# Altium PCB attenuator-pcb - 5.PcbDoc
Units mm, origin at the board's own origin, x right, y up, seen from the top; angles counter-clockwise.
Board outline 38.59 x 19.18 mm, 2 copper layers (Top Layer, Bottom Layer), stack 1.56 mm thick; 8 components, 37 nets, 22 pads, 34 vias.
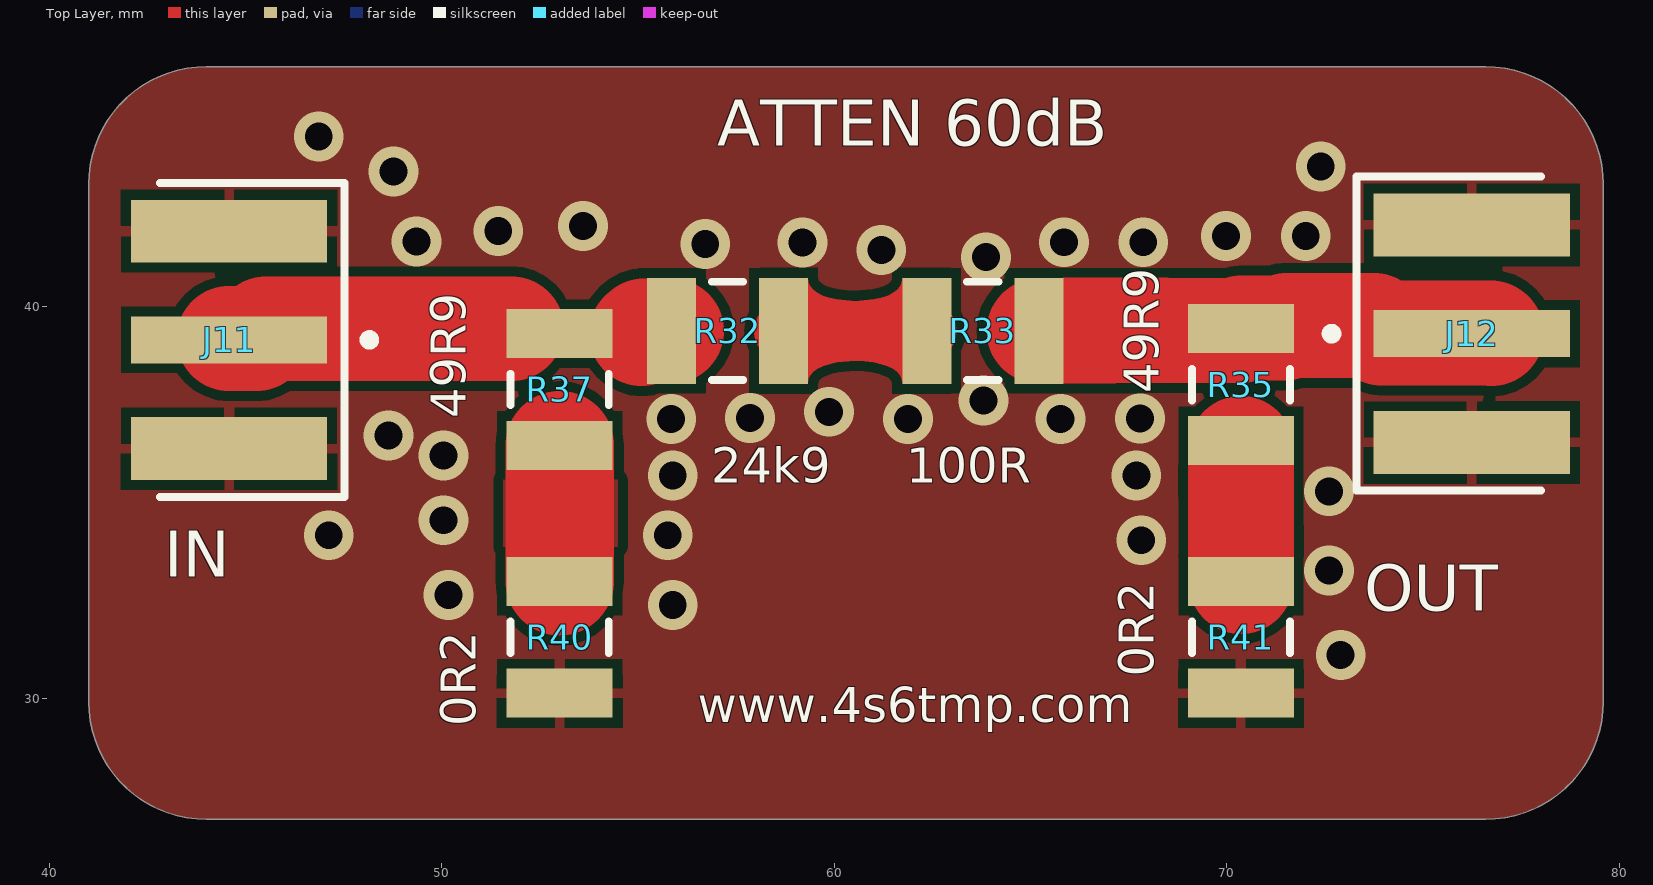
[diagram p0: Top Layer view]
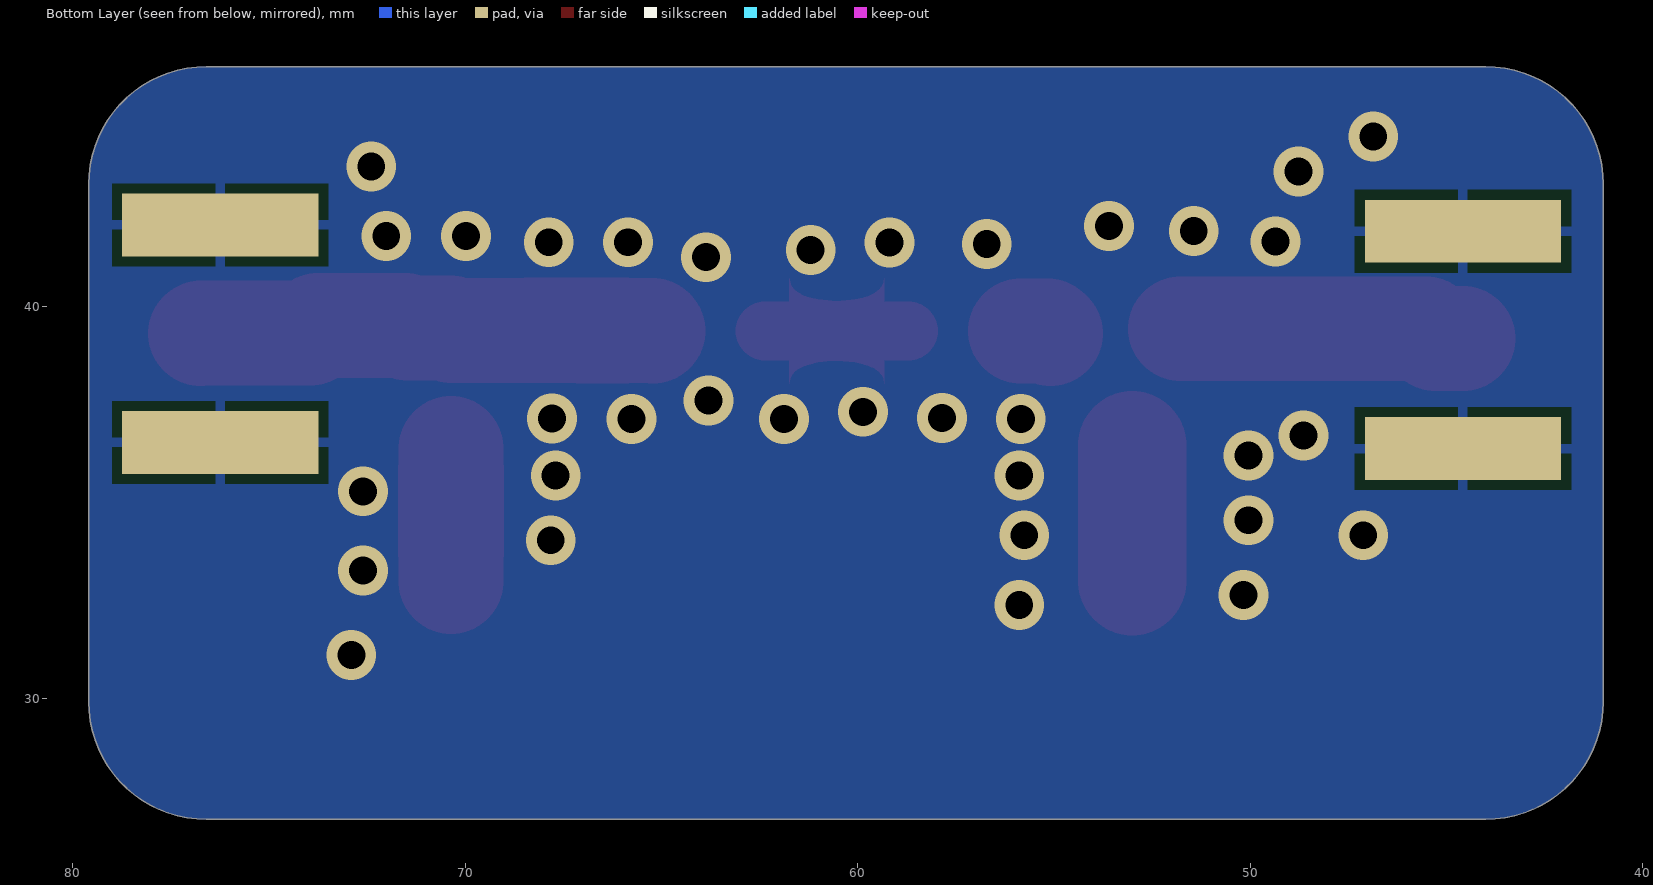
[diagram p1: Bottom Layer view, seen from below]

## Layer stack, top to bottom
Top Solder: solder mask 0.0203, Solder Resist, Dk 3.8
Top Layer: signal copper 0.035
Prepreg 7628: dielectric 1.49, FR-4, Dk 4.6
Bottom Layer: signal copper 0.035
Bottom Solder: solder mask 0.0203, Solder Resist, Dk 3.8

## Board outline
41,29.924 ccw(c44,29.924) 44,26.924 76.59,26.924 ccw(c76.59,29.924) 79.59,29.924 79.59,43.101 ccw(c76.59,43.101) 76.59,46.101 44,46.101 ccw(c44,43.101) 41,43.101

## Design rules (kind name [scope] priority, off if disabled: settings)
Clearance [All] p1: gap=0.254 ignorepadtopadclearanceinfootprint=FALSE except(0: Arc-Hole Track-Hole SMDPad-Hole THPad-Hole Via-Hole Fill-Hole Poly-Hole Region-Hole Text-Hole)
HoleToHoleClearance [All] p1: gap=0.1 allowstackedmicrovias=TRUE
MinimumSolderMaskSliver [All] p1 off: minsoldermaskwidth=0.1
PolygonConnect [All] p1: connectstyle=Relief reliefconductorwidth=0.254 reliefentries=4 polygonreliefangle="90 Angle" airgapwidth=0.254
RoomDefinition schematic [InComponentClass('schematic')] p1: confinementstyle=ConfineIn formatcopy=TRUE lockcomponents=FALSE outline 31.75,26.779 88.773,26.779 88.773,47.498 31.75,47.498
RoutingVias [All] p1: holewidth=0.711 width=1.27 viastyle="Through Hole" minholewidth=0.711 minwidth=1.27 maxholewidth=0.711 maxwidth=1.27
SolderMaskExpansion [All] p1: expansion=0.102 istentingtop=FALSE
Width [All] p1: maxlimit=3 minlimit=1.5 preferedwidth=2.673 impedanceprofiledriven=TRUE impedanceprofileid={88FF0C83-8680-40BB-AEE6-F79FA2882ED4} impedanceprofilevalue=50.000000 minimp=50.000000 maximp=50.000000 favimp=50.000000
Width Width_1 [All] p2: maxlimit=2 minlimit=0.254 preferedwidth=1 minimp=50.000000 maximp=50.000000 favimp=50.000000
28 further rules are at their usual default settings.

## Components (designator, comment, footprint, x,y, rotation, side; value= is the part's Value field where it differs from the comment)
J11 "IN" FP-CON-SMA-EDGE-S-MFG 37.317,39.14 r90 top
J12 "OUT" FP-CON-SMA-EDGE-S-MFG 83.5,39.298 r270 top
R32 "24k9" RESC3225X70X50NL20T20 57.277,39.37 r0 top
R33 "100R" RESC3225X70X50NL20T20 63.782,39.37 r0 top
R35 "49R9" RESC3225X70X50NL20T20 70.358,38 r90 top
R37 "49R9" RESC3225X70X50NL20T20 53,37.877 r90 top
R40 "0R2" RESC3225X70X50NL20T20 53,31.564 r90 top
R41 "0R2" RESC3225X70X50NL20T20 70.358,31.564 r90 top

## Footprints (in the part's own frame and the unit in brackets; to place one, negate y for a bottom-side part, rotate by r counter-clockwise, add the part's x,y. Pads: shape width x height; smd on the part's side, far side on the other; paste and mask are expansions set on the pad)
FP-CON-SMA-EDGE-S-MFG [mm]
  rect 1.2x5 smd paste+0 mask+0: 1(0,-7.26)
  rect 1.6x5 smd paste+0 mask+0: 2(-2.77,-7.26) 3(2.77,-7.26)
  rect 1.6x5 smd far side paste+0 mask+0: 4(-2.77,-7.26) 5(2.77,-7.26)
  silkscreen extent -4,-10.96 4,-5.5, body extent -3.67,-9.86 3.67,4.86, height 0.25
RESC3225X70X50NL20T20 [mm] "Chip Resistor, 2-Leads, Body 3.20x2.50mm, IPC Medium Density"
  rect 1.25x2.7 smd: 1(-1.425,0) 2(1.425,0)
  silkscreen extent -0.4,-1.25 0.4,1.25, body extent -1.7,-1.35 1.7,1.35, height 0.7

## Part data
J11 J12: library part CMP-204357-000001-1, "CONN SMA JACK STR EDGE MNT", Frequency=18GHz, Manufacturer="RF Solutions Ltd.", Manufacturer Part Number=CON-SMA-EDGE-S, Package=CONN_JACK, Automotive=No, Category=Conn, ComponentLink2Description=Datasheet, ComponentLink2URL=https://www.rfsolutions.co.uk/downloads/1498648656DS-CON-EDGE-SMA-4.pdf, Conn Orientation="Right Angle", Contact Material=Gold, Device Class L1=Connectors, Device Class L2="RF / Coaxial Connectors", Device Class L3=unset, Digikey Description="CONN SMA JACK STR EDGE MNT", Footprint Url=https://forum.upverter.com/uploads/default/original/3X/b/e/be75b907af57498775929d6d9099689c472e0307.pdf, Height=6.35mm, Impedance=50Ω, Is Female=yes, Lead Free=Yes, Number Of Contacts=1, Octopart=https://octopart.com/con-sma-edge-s-rf+solutions-70967450, RoHS=TRUE, Shielding=true
R32 R33 R35 R37 R40 R41: library part CMP-2005-01957-1, Manufacturer=Panasonic, Part Number=ERJ-14NF1001U

## Via types
v1: diameter 1.27, hole 0.711, Top Layer to Bottom Layer, 34 vias

## Nets (pads, with @x,y where several pads share a name; then routed paths per layer and width w, separated by ;. In a path a pad name is that pad's centre, name@x,y a point inside that pad or via, vN(x,y) a via of type N, cw(c..) or ccw(c..) an arc to the next point about the centre after c; other vN are vias at no path point)
GND: J11.2 J11.3 J11.4 J11.5 J12.2 J12.3 J12.4 J12.5 R40.1 R41.1
  other v1: 72.898,31.115 55.88,32.385 50.165,32.639 72.603,33.262 67.818,34.036 47.117,34.163 55.753,34.163 50.038,34.544 72.603,35.282 55.88,35.687 67.691,35.687 50.038,36.195 48.641,36.703 55.842,37.123 61.875,37.123 65.761,37.123 67.781,37.139 57.849,37.153 59.863,37.308 63.797,37.593 63.866,41.247 61.194,41.431 56.709,41.586 59.183,41.617 65.849,41.628 67.869,41.628 49.348,41.649 69.977,41.783 72.009,41.783 51.435,41.91 53.594,42.037 48.768,43.434 72.39,43.561 46.863,44.323
NetJ1_1: 
NetJ2_1: 
NetJ3_1: 
NetJ4_1: 
NetJ5_1: 
NetJ6_1: 
NetJ7_1: 
NetJ8_1: 
NetJ9_1: 
NetJ10_1: 
NetJ11_1: J11.1 R32.1 R37.2 | length 8.1
  Top Layer w2.673: J11.1@44.577,39.175 45.271,39.175 45.52,39.424 R37.2@51.769,39.424 ; 55.086,39.302 55.154,39.37 R32.1
NetJ12_1: J12.1 R33.2 R35.2 | length 11.7
  Top Layer w2.673: R33.2 65.22,39.384 70.344,39.384 70.358,39.397 R35.2 70.372,39.438 71.463,39.438 71.534,39.51 73.748,39.51 73.941,39.318 76.721,39.318 J12.1@76.74,39.298
NetR1_2: 
NetR2_2: 
NetR4_2: 
NetR6_1: 
NetR7_1: 
NetR12_2: 
NetR13_2: 
NetR15_2: 
NetR17_2: 
NetR18_2: 
NetR20_1: 
NetR21_1: 
NetR22_1: 
NetR23_1: 
NetR24_1: 
NetR25_1: 
NetR30_2: 
NetR32_2: R32.2 R33.1 | length 3.7
  Top Layer w1.5: R32.2 R33.1
NetR34_1: 
NetR35_1: R35.1 R41.2 | length 3.4
  Top Layer w2.673: R41.2 R35.1@70.358,36.371
NetR36_1: 
NetR37_1: R37.1 R40.2 | length 3.5
  Top Layer w2.763: R40.2 R37.1
NetR38_1: 
NetR39_1: 

## Polygon pours and split planes (outlines as drawn)
GND on Top Layer "Top Layer-No Net" (solid, pour order 24): 41,29.924 ccw(c44,29.924) 44,26.924 76.59,26.924 ccw(c76.59,29.924) 79.59,29.924 79.59,43.101 ccw(c76.59,43.101) 76.59,46.101 44,46.101 ccw(c44,43.101) 41,43.101
GND on Top Layer "Top Layer-GND 11" (solid, remove dead copper, pour order 20): 167 vertices, not listed, extent 67.473,30.108 73.243,39.253
GND on Top Layer "Top Layer-GND 12" (solid, remove dead copper, pour order 19): 163 vertices, not listed, extent 56.412,36.484 64.647,42.256
GND on Top Layer "Top Layer-GND 14" (solid, remove dead copper, pour order 16): 154 vertices, not listed, extent 62.326,36.414 83.136,42.306
GND on Top Layer "Top Layer-GND 13" (solid, remove dead copper, pour order 18): 41.577,42.05 41.577,36.301 41.677,36.291 50.532,36.291 50.583,36.296 50.633,36.294 50.683,36.302 50.733,36.304 50.93,36.33 51.082,36.35 51.095,36.353 51.131,36.361 51.181,36.366 51.277,36.395 51.372,36.417 55.086,36.417 55.136,36.422 55.186,36.421 55.236,36.429 55.286,36.431 55.483,36.456 55.635,36.476 55.648,36.48 55.666,36.484 56.477,36.484 56.777,36.513 57.065,36.6 57.331,36.742 57.563,36.934 57.755,37.166 57.797,37.247 57.818,37.262 57.887,37.335 57.96,37.404 57.99,37.445 58.024,37.481 58.238,37.761 58.265,37.803 58.297,37.842 58.344,37.931 58.397,38.016 58.415,38.064 58.439,38.108 58.574,38.433 58.588,38.481 58.609,38.527 58.632,38.625 58.661,38.721 58.666,38.771 58.677,38.821 58.723,39.169 58.725,39.22 58.733,39.27 58.73,39.37 58.733,39.47 58.725,39.52 58.723,39.571 58.677,39.919 58.666,39.969 58.661,40.019 58.632,40.115 58.609,40.213 58.588,40.259 58.574,40.307 58.439,40.632 58.415,40.676 58.397,40.724 58.344,40.809 58.297,40.898 58.265,40.937 58.238,40.979 58.024,41.259 57.99,41.295 57.96,41.336 57.887,41.405 57.818,41.478 57.797,41.493 57.755,41.574 57.563,41.806 57.331,41.998 57.065,42.14 56.777,42.227 56.477,42.256 55.227,42.256 55.207,42.255 55.154,42.255 55.104,42.25 55.054,42.251 55.004,42.243 54.953,42.241 54.605,42.195 54.046,42.065 50.446,42.183 50.396,42.175 50.345,42.173 49.997,42.127 49.947,42.116 49.897,42.111 49.801,42.082 49.707,42.06 41.677,42.06
GND on Top Layer "Top Layer-GND 10" (solid, remove dead copper, pour order 21): 50.696,30.116 51.187,30.607 54.991,30.607 54.991,36.703 55.118,36.83 54.991,36.957 54.991,37.077 47.66,37.077 47.66,35.827 47.661,35.807 47.661,33.634 47.66,33.614 47.66,32.364 47.689,32.065 47.776,31.776 47.918,31.511 48.11,31.278 48.342,31.087 48.423,31.044 48.438,31.023 48.511,30.954 48.58,30.881 48.621,30.852 48.657,30.817 48.937,30.603 48.979,30.576 49.018,30.544 49.107,30.497 49.192,30.444 49.24,30.426 49.284,30.402 49.609,30.268 49.657,30.253 49.703,30.232 49.801,30.209 49.897,30.18 49.947,30.175 49.997,30.164 50.345,30.118 50.396,30.116 50.446,30.108 50.546,30.111 50.646,30.108
NetR37_1 on Top Layer "NETR37_1_L01_P015" (solid, remove dead copper, pour order 15): 51.562,32.258 54.483,32.258 54.483,37.084 51.562,37.084
GND on Bottom Layer "Top Layer-GND" (solid, pour order 25): 41,29.924 ccw(c44,29.924) 44,26.924 76.59,26.924 ccw(c76.59,29.924) 79.59,29.924 79.59,43.101 ccw(c76.59,43.101) 76.59,46.101 44,46.101 ccw(c44,43.101) 41,43.101

## Silkscreen, mask and mechanical layers (free items; w line width, h text height)
Top Overlay:
  text "ATTEN 60dB" at 57.015,43.702 h2
  text "www.4s6tmp.com" at 56.515,29.1 h1.52
Mechanical 1:
  the board outline again, w0.254